# EAGLE board zigbee_ctrl (EAGLE 6.6.0)
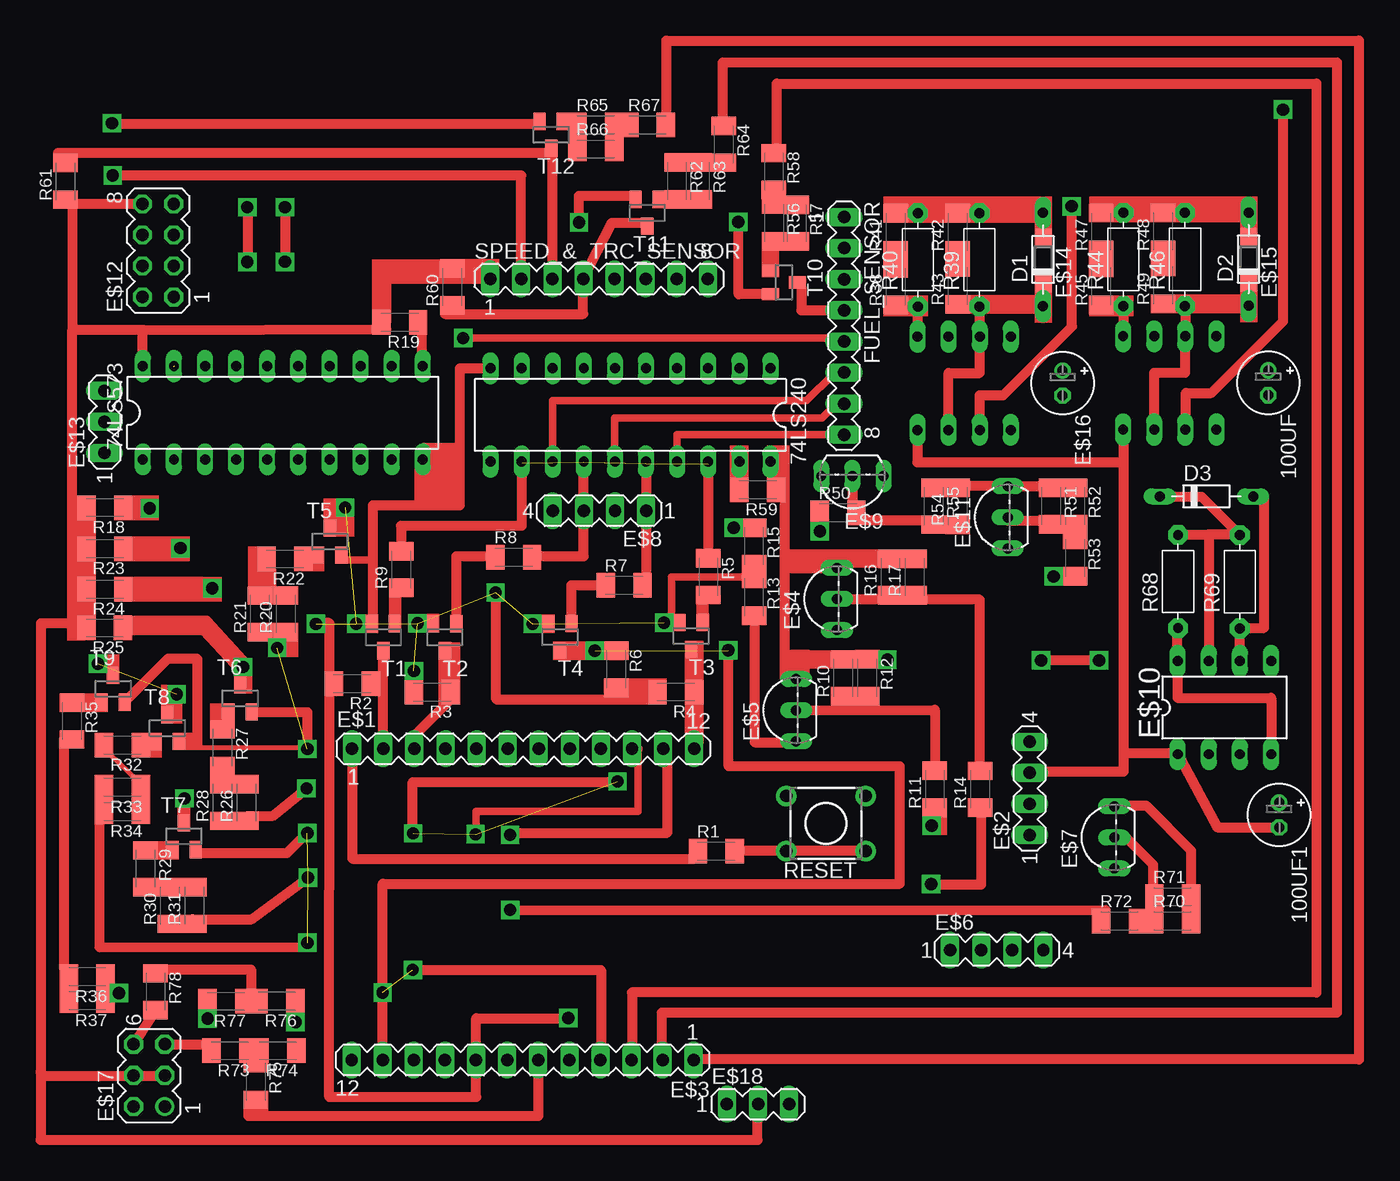
[diagram p0: board, top side]
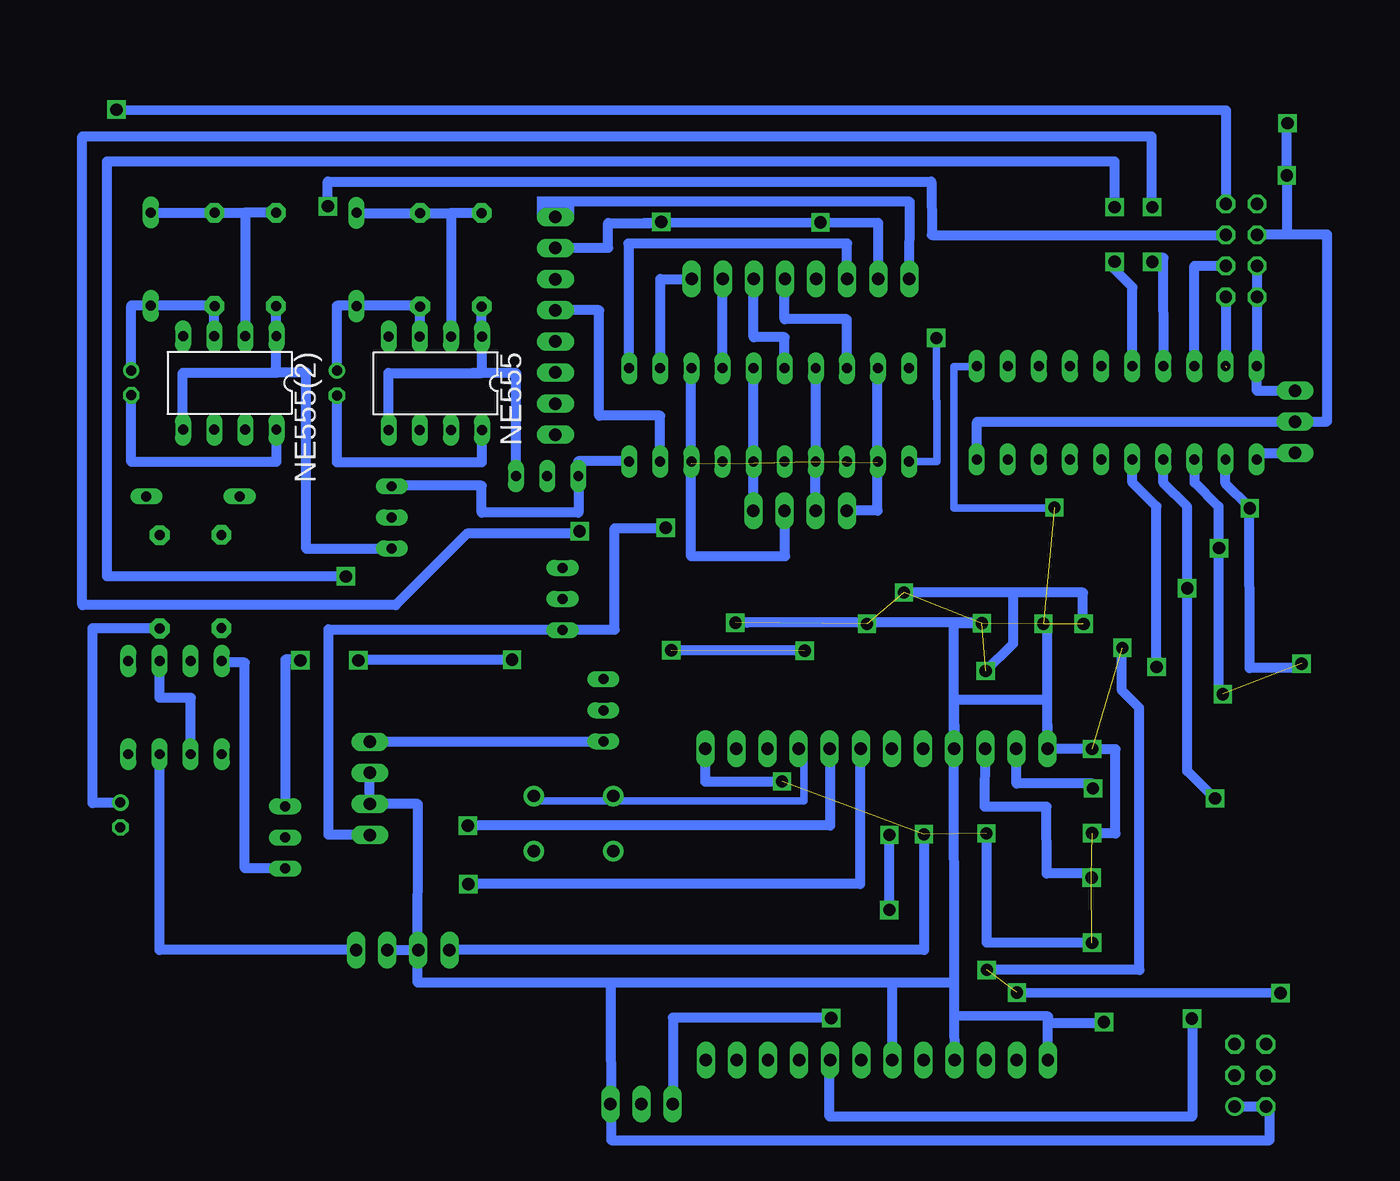
[diagram p1: board, bottom side, seen from below]

No outline drawn. Coordinates in mm, seen from the top.
Copper layers (1*16): Top 0.035mm / dielectric 1.5mm / Bottom 0.035mm
Design rules "default": minimum track width 10mil, minimum drill 24mil, track to track 8mil, track to pad 8mil, pad to pad 8mil, via to via 8mil, smd to smd 8mil, copper to edge 40mil, drill to drill 8mil, minimum pad ring 10mil, minimum via ring 8mil, stop-mask expansion 4mil, vias tented up to drill 0mil, thermal gap 10mil

## Footprints (pad centres in the part's own frame; a part is rotated, then mirrored left to right if it is on the bottom)
DIL20 = drill 0.813 long: 1 -11.43,-3.81; 2 -8.89,-3.81; 3 -6.35,-3.81; 4 -3.81,-3.81; 5 -1.27,-3.81; 6 1.27,-3.81; 7 3.81,-3.81; 8 6.35,-3.81; 9 8.89,-3.81; 10 11.43,-3.81; 11 11.43,3.81; 12 8.89,3.81; 13 6.35,3.81; 14 3.81,3.81; 15 1.27,3.81; 16 -1.27,3.81; 17 -3.81,3.81; 18 -6.35,3.81; 19 -8.89,3.81; 20 -11.43,3.81
E2-5 = drill 0.813 pad 1.27: + -1.016,0 | drill 0.813 pad 1.27 octagon: - 1.016,0
D-7.5 = drill 0.813 long: A 3.81,0; C -3.81,0
MA12-1 = drill 1.016 long: 1 -13.97,0; 2 -11.43,0; 3 -8.89,0; 4 -6.35,0; 5 -3.81,0; 6 -1.27,0; 7 1.27,0; 8 3.81,0; 9 6.35,0; 10 8.89,0; 11 11.43,0; 12 13.97,0
MA04-1 = drill 1.016 long: 1 -3.81,0; 2 -1.27,0; 3 1.27,0; 4 3.81,0
TO92-LINE = drill 0.813 long: 1 2.54,0; 2 0,0; 3 -2.54,0
DIL8 = drill 0.813 long: 1 -3.81,-3.81; 2 -1.27,-3.81; 3 1.27,-3.81; 4 3.81,-3.81; 5 3.81,3.81; 6 1.27,3.81; 7 -1.27,3.81; 8 -3.81,3.81
MA04-2 = drill 1.016 octagon: 1 -3.81,-1.27; 2 -3.81,1.27; 3 -1.27,-1.27; 4 -1.27,1.27; 5 1.27,-1.27; 6 1.27,1.27; 7 3.81,-1.27; 8 3.81,1.27
MA03-1 = drill 1.016 long: 1 -2.54,0; 2 0,0; 3 2.54,0
SOD123 = smd 1.4 x 1.4: A 1.9,0; C -1.9,0
MA03-2 = drill 1.016: 1 -2.54,-1.27 | drill 1.016 octagon: 2 -2.54,1.27; 3 0,-1.27; 4 0,1.27; 5 2.54,-1.27; 6 2.54,1.27
MA08-1 = drill 1.016 long: 1 -8.89,0; 2 -6.35,0; 3 -3.81,0; 4 -1.27,0; 5 1.27,0; 6 3.81,0; 7 6.35,0; 8 8.89,0
C1206K = smd 1.5 x 2: 1 -1.5,0; 2 1.5,0
R-7,5 = drill 0.813 pad 1.6 octagon: 1 -3.81,0; 2 3.81,0
TL1105 = drill 1 pad 1.676: 1 -2.25,3.25; 2 2.25,3.25; 3 -2.25,-3.25; 4 2.25,-3.25
SOT23 = smd 1 x 1.4: 1 -0.95,-1.1; 2 0.95,-1.1; 3 0,1.1

## Placement (x,y rotation side)
74LS240  [DIL20]  46.86,56.94 180 top
74LS573  [DIL20]  18.47,57.12 0 top
100UF  [E2-5]  98.94,59.56 270 top
100UF1  [E2-5]  99.83,24.26 270 top
D1  1N4148  [D-7.5]  80.55,69.63 90 top
D2  1N4148  [D-7.5]  97.34,69.66 90 top
D3  1N4148  [D-7.5]  93.9,50.29 0 top
E$1  [MA12-1]  38.1,29.67 0 top
E$2  [MA04-1]  79.46,26.44 90 top
E$3  [MA12-1]  38.06,4.26 180 top
E$4  [TO92-LINE]  63.73,41.91 90 top
E$5  [TO92-LINE]  60.39,32.82 90 top
E$6  [MA04-1]  76.77,13.23 0 top
E$7  [TO92-LINE]  86.38,22.43 90 top
E$8  [MA04-1]  44.33,49.12 180 top
E$9  [TO92-LINE]  64.98,51.95 180 top
E$10  [DIL8]  95.37,33.04 0 top
E$11  [TO92-LINE]  77.67,48.57 90 top
E$12  [MA04-2]  8.29,70.37 90 top
E$13  [MA03-1]  3.92,56.38 90 top
E$14  [SOD123]  80.58,69.56 270 top
E$15  [SOD123]  97.37,69.59 270 top
E$16  100uf  [E2-5]  82.15,59.53 270 top
E$17  [MA03-2]  7.56,3 90 top
E$18  [MA03-1]  57.28,0.65 0 top
FUEL_SENSOR  [MA08-1]  64.3,64.21 270 top
NE555  [DIL8]  74.11,59.52 180 bottom
NE555(2)  [DIL8]  90.9,59.55 180 bottom
R1  1k_Ohm  [C1206K]  53.88,21.3 0 top
R2  10k_Ohm  [C1206K]  24.15,34.99 180 top
R3  10k_Ohm  [C1206K]  30.68,34.3 180 top
R4  10k_Ohm  [C1206K]  50.57,34.31 180 top
R5  1k_Ohm  [C1206K]  53.23,43.73 270 top
R6  10k_Ohm  [C1206K]  45.7,36.17 270 top
R7  1k_Ohm  [C1206K]  46.35,43.02 0 top
R8  1k_Ohm  [C1206K]  37.33,45.32 0 top
R9  1k_Ohm  [C1206K]  28.14,44.31 90 top
R10  10k_Ohm  [C1206K]  64.23,35.47 90 top
R11  1k1_Ohm  [C1206K]  71.72,26.37 90 top
R12  10k_Ohm  [C1206K]  66.2,35.48 270 top
R13  10k_Ohm  [C1206K]  56.95,42.05 270 top
R14  1k1_Ohm  [C1206K]  75.41,26.36 90 top
R15  10k_Ohm  [C1206K]  56.95,46.23 270 top
R16  10k_Ohm  [C1206K]  68.09,43.7 90 top
R17  10k_Ohm  [C1206K]  70.07,43.7 90 top
R18  10k_Ohm  [C1206K]  3.94,49.37 180 top
R19  1k_Ohm  [C1206K]  28.02,64.5 180 top
R20  1k1_Ohm  [C1206K]  18.72,40.69 90 top
R21  1k1_Ohm  [C1206K]  16.61,40.69 90 top
R22  100_Ohm  [C1206K]  18.65,45.17 180 top
R23  10k_Ohm  [C1206K]  3.94,46.02 180 top
R24  10k_Ohm  [C1206K]  3.94,42.71 180 top
R25  10k_Ohm  [C1206K]  3.93,39.54 180 top
R26  1k1_Ohm  [C1206K]  15.51,25.28 90 top
R27  100_Ohm  [C1206K]  13.54,29.75 270 top
R28  1k1_Ohm  [C1206K]  13.54,25.28 90 top
R29  100_Ohm  [C1206K]  7.27,19.87 270 top
R30  1k1_Ohm  [C1206K]  9.26,16.87 90 top
R31  1k1_Ohm  [C1206K]  11.24,16.87 90 top
R32  100_Ohm  [C1206K]  5.38,29.97 180 top
R33  1k1_Ohm  [C1206K]  5.38,26.53 180 top
R34  1k1_Ohm  [C1206K]  5.38,24.55 180 top
R35  100_Ohm  [C1206K]  1.25,31.94 270 top
R36  1k1_Ohm  [C1206K]  2.5,11.06 180 top
R37  1k1_Ohm  [C1206K]  2.5,9.1 180 top
R38  10k_Ohm  [C1206K]  68.52,67.41 90 top
R39  4.7k  [R-7,5]  75.36,69.61 90 top
R40  4.7k  [R-7,5]  70.33,69.61 90 top
R41  10k_Ohm  [C1206K]  68.52,71.88 90 top
R42  10k_Ohm  [C1206K]  73.57,71.89 90 top
R43  10k_Ohm  [C1206K]  73.57,67.48 90 top
R44  4.7k  [R-7,5]  87.12,69.64 90 top
R45  10k_Ohm  [C1206K]  85.31,67.44 90 top
R46  4.7k  [R-7,5]  92.15,69.64 90 top
R47  10k_Ohm  [C1206K]  85.31,71.91 90 top
R48  10k_Ohm  [C1206K]  90.36,71.92 90 top
R49  10k_Ohm  [C1206K]  90.36,67.51 90 top
R50  10k_Ohm  [C1206K]  63.82,48.93 0 top
R51  10k_Ohm  [C1206K]  81.21,49.5 270 top
R52  10k_Ohm  [C1206K]  83.18,49.5 270 top
R53  10k_Ohm  [C1206K]  83.16,45.25 270 top
R54  10k_Ohm  [C1206K]  73.57,49.48 90 top
R55  10k_Ohm  [C1206K]  71.61,49.49 270 top
R56  1k1_Ohm  [C1206K]  58.59,72.61 270 top
R57  1k1_Ohm  [C1206K]  60.43,72.6 270 top
R58  100_Ohm  [C1206K]  58.58,76.81 270 top
R59  10k_Ohm  [C1206K]  57.25,50.82 180 top
R60  1k_Ohm  [C1206K]  32.31,67.39 90 top
R61  1k_Ohm  [C1206K]  0.73,76.02 90 top
R62  1k1_Ohm  [C1206K]  50.66,76.05 270 top
R63  1k1_Ohm  [C1206K]  52.54,76.05 270 top
R64  100_Ohm  [C1206K]  54.49,79.04 270 top
R65  1k1_Ohm  [C1206K]  44.04,80.62 0 top
R66  1k1_Ohm  [C1206K]  44.03,78.64 0 top
R67  100_Ohm  [C1206K]  48.25,80.62 0 top
R68  4.7k  [R-7,5]  91.58,43.33 90 top
R69  4.7k  [R-7,5]  96.62,43.31 90 top
R70  10k_Ohm  [C1206K]  91.14,15.6 0 top
R71  10k_Ohm  [C1206K]  91.14,17.58 0 top
R72  1k_Ohm  [C1206K]  86.81,15.6 0 top
R73  1k1_Ohm  [C1206K]  14.14,5.01 180 top
R74  1k1_Ohm  [C1206K]  18.08,5.01 180 top
R75  1k1_Ohm  [C1206K]  16.27,2.51 270 top
R76  1k1_Ohm  [C1206K]  17.99,9.07 180 top
R77  1k1_Ohm  [C1206K]  13.83,9.05 180 top
R78  1k1_Ohm  [C1206K]  8.09,9.83 270 top
RESET  [TL1105]  62.83,23.57 90 top
SPEED_&_TRC_SENSOR  [MA08-1]  44.29,68.04 0 top
T1  BCW33  [SOT23]  26.68,38.78 180 top
T2  BCW33  [SOT23]  31.7,38.78 180 top
T3  BCW33  [SOT23]  51.81,38.88 180 top
T4  BCW33  [SOT23]  41.1,38.8 180 top
T5  BCW33  [SOT23]  22.31,46.59 0 top
T6  BCW33  [SOT23]  14.98,33.79 0 top
T7  BCW33  [SOT23]  10.4,22.53 0 top
T8  BCW33  [SOT23]  9.04,31.36 0 top
T9  BCW33  [SOT23]  4.61,34.57 0 top
T10  BCW33  [SOT23]  59.39,67.76 270 top
T11  BCW33  [SOT23]  48.23,73.44 180 top
T12  BCW33  [SOT23]  40.39,79.81 180 top

## Library data of the parts
74LS240 = 74ttl-din
74LS573 = 40xx
100UF 100UF1 E$16 R1-R38 R41-R43 R45 R47-R67 R70-R78 = rcl
D1-D3 E$14 E$15 = diode
E$1-E$3 E$6 E$8 E$12 E$13 E$17 E$18 FUEL_SENSOR SPEED_&_TRC_SENSOR = con-lstb
E$4 E$5 E$7 E$9 E$11 = ref-packages-longpad
E$10 NE555 NE555(2) = microchip
R39 R40 R44 R46 R68 R69 = discrete
RESET = switch
T1-T12 = smd-ipc

## Nets
S$28: SPEED_&_TRC_SENSOR.8
S$31: SPEED_&_TRC_SENSOR.5
S$46: SPEED_&_TRC_SENSOR.3
S$48: E$5.2
S$71: E$8.3

## Tracks (layer width: path | path; a pad name or v marks a point on that pad's centre or on a via)
S$1
  Bottom 0.813: 31.71,4.19 31.76,7.86 24.09,7.81 24.09,4.34
S$2
  Bottom 0.813: 31.78,33.69 31.74,29.68 | 31.74,7.42 31.78,33.69 | 24.15,29.74 24.19,33.69 31.78,33.69
S$3
  Top 0.813: 66.05,21.37 55.09,21.37 55.09,21.31
S$4
  Top 0.813: 52.09,20.7 24.17,20.7 24.17,29.75
S$5
  Bottom 0.61: 66.09,25.43 43.99,25.43 43.99,29.71
S$6
  Top 0.813: 22.29,35 22.26,1.24 34.26,1.24 34.26,4.27 34.26,4.36 34.26,7.66 41.86,7.66
S$7
  Top 0.813: 26.66,29.64 26.66,37.11
S$8  (via drill 1)  (7 unrouted)
  other vias: 24.46,39.88 29.48,39.92 21.18,39.87 29.17,36.03 49.61,39.97 38.87,39.87 35.85,42.43 23.56,49.37
S$9
  Bottom 0.813: 24.13,29.7 24.13,39.91
S$10
  Bottom 0.813: 31.77,29.63 31.77,39.93 29.43,39.93
S$11
  Top 0.813: 22.28,34.36 22.28,39.93 21.17,39.93
S$12
  Bottom 0.813: 21.22,39.86 21.22,42.43 26.93,42.43 26.93,38.26
S$13
  Top 0.813: 29.2,29.64 29.2,30.73 32.23,33.76
S$14
  Bottom 0.813: 26.92,39.47 26.92,38.27 29.24,35.99
S$15
  Bottom 0.813: 29.45,39.97 48.63,39.97 49.63,39.98
S$16
  Top 0.813: 53.27,52.13 53.23,52.13 53.23,45.37
S$17  (3 unrouted)
  Bottom 0.813: 53.23,52.93 53.23,60.73 | 48.13,52.97 48.13,60.77 | 43.04,53.07 43.04,60.87 | 37.99,53.02 37.99,60.82
S$18  (via drill 1)  (1 unrouted)
  other vias: 54.85,37.72 43.95,37.67 62.33,47.44 81.42,43.75
S$19
  Top 0.813: 26.64,4.26 26.64,18.64 68.85,18.64 68.85,28.25
S$20
  Bottom 0.813: 54.8,37.68 43.94,37.68 43.94,37.71
S$21
  Bottom 0.813: 24.96,42.44 35.9,42.44
S$22
  Top 0.813: 35.9,42.48 35.9,33.71 48.85,33.71
S$23
  Top 0.813: 48.19,42.76 48.19,53.12
S$24
  Top 0.813: 42.05,39.99 42.05,43.03 45.09,43.03
S$25
  Top 0.813: 32.66,39.92 32.66,45.4 35.73,45.4
S$26
  Top 0.813: 38.81,45.4 43.05,45.4 43.05,53.12
S$27
  Top 0.813: 28.13,45.92 28.13,47.89 37.99,47.89 37.99,53.22
S$28
  Bottom 0.813: 55.73,60.7 55.73,68.04 SPEED_&_TRC_SENSOR.8
S$29
  Bottom 0.813: 50.67,60.73 50.67,68.04
S$30
  Bottom 0.813: 45.6,60.73 45.6,63.29 48.12,63.29 48.12,68.08
S$31
  Bottom 0.813: 40.5,60.81 40.5,64.76 45.6,64.76 45.6,68.04 SPEED_&_TRC_SENSOR.5
S$32
  Top 0.61: 50.68,53.14 50.68,55.32 64.36,55.32
S$33
  Top 0.61: 45.57,53.04 45.57,56.66 62.5,56.66 63.71,57.87
S$34
  Top 0.61: 40.52,53.09 40.52,58.1 61.25,58.1 63.34,60.19
S$35
  Top 0.813: 25.86,39.95 25.84,49.57 32.93,49.57
S$36  (via drill 1)
  Bottom 0.61: 35.45,53.14 33.17,53.14 v33.2,63.22 33.17,63.07
  other vias: 100.15,81.87 82.89,73.98 15.57,73.9 18.64,73.9 15.57,69.44 18.64,69.45 4.58,76.49 55.66,72.71 42.66,72.65 4.53,80.76
S$37
  Top 0.61: 33.24,63.21 63.47,63.21 63.23,62.83
S$38
  Top 0.813: 68.84,28.27 54.88,28.27 54.88,37.65
S$39
  Bottom 0.813: 41.86,29.66 41.86,23.4 70.72,23.4
S$40
  Bottom 0.813: 39.4,29.71 39.4,18.62 70.67,18.62
S$41  (via drill 1)
  other vias: 71.46,23.4 67.85,36.94 80.39,36.89 85.13,36.89
S$42  (via drill 1)
  other vias: 71.41,18.62
S$43
  Bottom 0.813: 35.4,68.03 35.37,74.35 64.29,74.35
S$44
  Bottom 0.813: 37.94,68 37.94,72.63 57.01,72.6
S$45
  Bottom 0.813: 55.75,53.12 55.75,56.87 60.74,56.87 60.74,65.49 64.37,65.49
S$46
  Bottom 0.813: SPEED_&_TRC_SENSOR.3 40.48,70.94 58.34,70.94 58.34,60.62
S$47
  Bottom 0.813: 56.48,72.6 59.99,72.6 60,70.56 64.33,70.56
S$48
  Top 0.813: E$5.2 71.71,32.86 71.71,27.71
S$49
  Top 0.813: 58.29,53.12 59.46,53.14 59.46,44.45 | 59.46,36.08 59.46,44.45 | 59.46,44.45 63.79,44.45
S$50
  Top 0.61: 57,43.68 50.2,43.68 50.2,39.91
S$51
  Top 0.813: 60.43,30.21 57.01,30.21 57.01,40.29
S$52
  Bottom 0.813: 60.38,30.24 79.48,30.24
S$53
  Top 0.813: 71.41,18.58 75.51,18.58 75.51,24.68
S$54  (via drill 1)
  other vias: 55.29,47.73
S$55
  Bottom 0.813: 55.27,47.7 59.46,47.7 59.46,39.38 63.8,39.38
S$56
  Top 0.813: 75.39,27.79 75.39,41.86 63.57,41.86
S$57
  Bottom 0.813: 63.82,39.43 82.84,39.43 82.84,22.65 79.44,22.65
S$58
  Bottom 0.813: 79.44,27.7 79.48,27.7 79.48,25.16 75.52,25.16 75.56,10.57 31.83,10.57
S$59  (via drill 1)  (2 unrouted)
  other vias: 34.21,22.69 29.11,22.76 45.81,27.01
S$60  (via drill 1)
  other vias: 37.03,22.64
S$61
  Bottom 0.813: 34.19,16.41 34.19,13.24 73.09,13.24
S$62  (via drill 1)
  other vias: 37.04,16.51
S$63
  Bottom 0.813: 34.25,22.99 34.19,22.99 34.19,16.46
S$64
  Bottom 0.813: 37.02,16.46 37.02,22.96
S$65
  Top 0.61: 34.25,22.96 34.25,24.57 47.46,24.55 47.46,29.67
  Top 0.813: 47.46,29.67 47.07,29.69
S$66
  Top 0.813: 37.02,22.81 49.87,22.81 49.87,29.69
S$67
  Top 0.813: 37.07,16.52 85.66,16.48
S$68
  Bottom 0.813: 78.04,13.21 75.54,13.21 75.54,13.23
S$69
  Bottom 0.813: 45.56,49.08 45.56,45.39 53.22,45.39 53.22,53.13
S$70
  Bottom 0.813: 48.12,49.08 48.12,53.1
S$71
  Bottom 0.813: E$8.3 43.06,53.13
S$72
  Bottom 0.813: 40.54,49.12 38,49.12 38,53.19
S$73
  Bottom 0.813: 45.8,26.97 52.07,26.97 52.07,29.7
S$74
  Top 0.813: 29.08,22.72 29.08,26.96 45.8,26.96
S$75
  Top 0.813: 32.93,49.57 32.93,60.75 35.53,60.75
S$76
  Bottom 0.813: 3.92,56.37 29.88,56.37 29.88,53.18
S$77
  Bottom 0.813: 3.92,53.81 7.06,53.81 7.06,53.22
S$78
  Bottom 0.813: 3.92,58.89 7.02,58.89 7.02,60.99
S$79
  Top 0.813: 7.03,60.84 7.03,63.87 26.91,63.93
S$80
  Top 0.813: 29.85,60.74 29.85,63.77
S$81
  Bottom 0.61: 23.57,49.34 31.76,49.34 31.76,60.9 29.83,60.9
S$82
  Top 0.61: 23.32,45.14 23.32,45.1 25.78,45.1
S$83  (via drill 1)  (1 unrouted)
  Top 0.813: 44.45,4.25 44.45,11.61 v29.08,11.61
  other vias: 26.62,9.77
S$84
  Bottom 0.813: 29.23,11.6 16.62,11.6 16.63,33.01
S$85  (via drill 1)  (1 unrouted)
  other vias: 18.01,37.91 20.47,29.66
S$86
  Bottom 0.813: 9.59,53.3 9.59,51.35 7.65,49.41 7.64,49.41 7.62,36.39
S$87
  Bottom 0.813: 12.1,53.35 12.1,51.4 10.16,49.46 10.15,49.46 10.15,34.01
S$88  (via drill 1)
  Bottom 0.813: 14.66,53.34 14.66,51.39 12.72,49.45 12.71,49.45 v12.71,42.79 12.71,34.02 12.71,34 12.71,27.86 10.43,25.58
S$89
  Bottom 0.813: 17.18,53.35 17.18,51.4 15.24,49.46 15.23,49.46 15.23,36.27
S$90  (via drill 1)
  other vias: 7.6,49.32
S$91  (via drill 1)
  other vias: 10.12,46.06
S$92  (via drill 1)
  other vias: 15.22,36.35
S$93
  Top 0.813: 5.75,40.13 12.26,40.13 15.57,36.52
S$94
  Top 0.813: 5.73,39.37 12,39.37 15.01,36.12
S$95
  Top 0.813: 7.1,63.89 1.28,63.89 1.28,49.72
S$96
  Bottom 0.813: 20.46,29.67 24.19,29.67 24.19,29.7
S$97
  Top 0.813: 15.94,32.66 20.47,32.66 20.47,29.59
S$98  (via drill 1)
  Top 0.813: 15.59,24.16 17.6,24.16 v20.41,26.44
S$99
  Bottom 0.813: 20.45,26.83 26.66,26.83 26.66,29.7
S$100  (via drill 1)  (2 unrouted)
  other vias: 20.47,22.78 20.53,19.15 20.48,13.83 19.51,7.35 41.78,7.68 41.78,7.68
S$101
  Top 0.813: 11.39,21.15 18.81,21.15 20.47,22.81
S$102
  Bottom 0.813: 16.65,33.03 18.05,34.43 18.04,37.9
S$103
  Bottom 0.813: 20.47,29.63 18.58,29.63 18.58,22.75 20.5,22.75 20.5,22.78
S$104  (via drill 1)
  other vias: 10.43,25.62
S$105
  Top 0.813: 11.08,15.76 15.94,15.76 20.57,19.15
S$106  (via drill 1)  (1 unrouted)
  other vias: 9.81,34.13 3.37,36.62
S$107
  Top 0.406: 10.45,29.78 20.28,29.78
S$108
  Top 0.406: 6.59,27.09 4.41,29.13
S$109
  Top 0.813: 3.51,25.01 3.51,13.47 20.8,13.49
S$110
  Bottom 0.813: 3.31,36.27 7.62,36.27 7.62,36.72
S$111
  Top 0.813: 5.59,33.52 9.08,37.01 11.46,37.01 11.5,36.97 11.5,30.05
S$112
  Top 0.813: 1.1,11.67 0.64,11.67 0.64,30.54
S$113
  Bottom 0.813: 20.42,19.49 24.19,19.49 24.2,24.93 29.24,24.93 29.21,29.74
S$114
  Bottom 0.813: 20.5,13.83 29.09,13.83 29.09,22.82
S$115  (via drill 1)
  Bottom 0.813: 26.66,9.76 v5.09,9.72 4.89,9.72
  other vias: 12.33,7.64
S$116  (1 unrouted)
  Bottom 0.813: 9.53,60.84 9.53,66.64
S$117
  Bottom 0.813: 6.99,60.92 6.99,69.19
S$118
  Bottom 0.813: 3.93,56.41 1.29,56.41 1.29,71.66 7.05,71.66
S$119
  Bottom 0.813: 12.13,60.92 12.13,69.12 9.45,69.12
S$120
  Top 0.813: 6.95,74.16 1.29,74.16 1.29,63.84
S$121
  Bottom 0.813: 70.32,63.32 70.32,65.79 | 75.37,63.32 75.37,65.79
S$122
  Bottom 0.813: 70.32,73.43 72.84,73.43 | 72.84,73.43 72.84,63.29 | 75.46,73.43 72.84,73.43
S$123
  Bottom 0.813: 80.58,73.43 75.33,73.43
S$124
  Bottom 0.813: 82.15,60.55 82.15,65.85 75.4,65.85
S$125
  Top 0.813: 70.31,65.84 70.31,63.32
S$126
  Top 0.813: 75.26,65.84 75.37,65.84 75.37,63.3
S$127
  Bottom 0.813: 77.94,55.68 77.94,60.36 70.31,60.36 70.31,63.24
S$128
  Top 0.813: 72.84,55.66 72.84,60.36 75.38,60.36 75.38,63.3
S$129
  Bottom 0.813: 70.32,55.71 70.32,53.06 82.15,53.06 82.15,58.51
S$130
  Bottom 0.813: 87.11,63.35 87.11,65.82 | 92.16,63.35 92.16,65.82
S$131
  Bottom 0.813: 87.11,73.46 89.63,73.46 | 89.63,73.46 89.63,63.32 | 92.25,73.46 89.63,73.46
S$132
  Bottom 0.813: 97.37,73.46 92.12,73.46
S$133
  Bottom 0.813: 98.94,60.58 98.94,65.88 92.19,65.88
S$134
  Top 0.813: 87.1,65.87 87.1,63.35
S$135
  Top 0.813: 92.05,65.87 92.16,65.87 92.16,63.33
S$136
  Bottom 0.813: 94.73,55.71 94.73,60.39 87.1,60.39 87.1,63.27
S$137
  Top 0.813: 89.63,55.69 89.63,60.39 92.17,60.39 92.17,63.33
S$138
  Bottom 0.813: 87.11,55.74 87.11,53.09 98.94,53.09 98.94,58.54
S$139
  Bottom 0.813: 58.28,53.16 62.43,53.16 62.43,48.96 70.32,48.96 70.32,51.15 77.71,51.15
S$140
  Bottom 0.813: 67.51,51.98 67.51,60.34 71.15,60.34
S$141
  Top 0.813: 70.28,55.7 70.28,53.07 87.15,53.07 | 87.15,53.07 87.15,55.79 | 79.49,27.81 87.15,27.81 87.15,29.35 | 87.15,29.35 87.15,53.07 | 87.15,29.35 91.54,29.35 94.77,23.26 99.89,23.27
S$142
  Top 0.813: 77.7,51.11 77.7,51.14 73.45,51.14
S$143
  Top 0.813: 64.97,51.96 64.97,48.34 73.75,48.34
S$144
  Top 0.813: 77.7,51.14 82.46,51.14
S$145
  Top 0.813: 77.55,48.32 80.52,48.32 80.64,47.93
S$146
  Bottom 0.813: 77.7,45.99 84.65,45.99 84.65,60.4 87.46,60.4
S$147
  Top 0.813: 92.21,55.73 92.21,58.66
S$148
  Top 0.813: 92.22,58.73 94.31,58.73 100.17,64.59 100.17,81.78
S$149
  Bottom 0.813: 9.53,74.21 9.53,81.8 100.17,81.81
S$150
  Top 0.813: 75.38,55.7 75.38,58.55 77.31,58.55 82.91,64.15 82.91,74
S$151
  Bottom 0.813: 82.9,73.99 82.9,75.99 33.62,75.99 33.57,71.62 9.46,71.62
S$152
  Bottom 0.813: 81.42,43.76 100.91,43.76 100.91,77.64 18.65,77.64 18.65,73.92
S$153
  Bottom 0.813: 62.35,47.24 71.52,47.24 77.35,41.41 102.93,41.41 102.93,79.69 15.63,79.69 15.63,73.92 15.52,73.92
S$154
  Top 0.813: 15.62,73.91 15.62,69.37 | 18.65,73.96 18.65,69.42
S$155
  Bottom 0.813: 14.64,60.87 14.65,69.78 15.63,69.78
S$156
  Bottom 0.813: 17.18,60.87 17.18,67.37 18.87,69.06
S$157
  Top 0.813: 60.82,67.38 60.82,65.49 64.42,65.49
S$158
  Top 0.813: 58.81,78.51 58.81,83.99 102.88,83.99 102.88,9.78 46.97,9.78 46.97,4.17
S$159
  Top 0.813: 35.44,68.01 26.91,68.01 26.91,64.58
S$160
  Top 0.813: 37.94,67.97 37.94,76.49 4.54,76.49
S$161
  Bottom 0.813: 4.59,76.54 4.59,71.68 7.07,71.66
S$162
  Top 0.813: 32.31,65.55 31.72,65.18 42.99,65.18 42.99,68.12
S$163
  Top 0.813: 40.48,68.07 40.48,78.33 0.13,78.33
S$164
  Top 0.813: 58.42,66.8 55.7,66.8 55.7,72.75
S$165
  Top 0.813: 42.98,68.05 45.35,72.63 48.27,72.64
S$166
  Top 0.813: 42.66,72.7 42.66,74.83 47.22,74.83
S$167
  Top 0.813: 54.4,80.75 54.4,85.73 104.55,85.73 104.55,8.12 49.41,8.12 49.41,4.21
S$168
  Bottom 0.813: 4.56,76.47 4.6,76.47 4.6,80.67
S$169
  Top 0.813: 4.47,80.72 39.48,80.72 39.48,80.75
S$170
  Top 0.813: 49.8,80.66 49.8,87.51 106.35,87.51 106.35,4.3 51.91,4.3
S$171
  Top 0.813: 91.57,36.87 91.54,36.87 91.54,39.61 | 96.64,36.85 96.64,39.59
S$172
  Top 0.813: 91.58,47.19 94.06,47.19 94.11,47.19 | 94.11,47.19 94.11,36.81 | 96.58,46.98 96.58,47.19 94.11,47.19
S$173
  Top 0.813: 90.08,50.26 93.49,50.26 96.63,47.12
S$174
  Top 0.813: 96.65,39.55 98.61,39.55 98.61,50.26
S$175
  Bottom 0.813: 94.09,29.24 94.09,33.83 96.64,33.83 96.64,37.02
S$176
  Top 0.813: 91.52,36.88 91.52,33.83 99.18,33.83 99.18,29.21
S$177
  Bottom 0.813: 80.59,13.25 96.63,13.25 96.63,29.33
S$178
  Bottom 0.813: 99.84,25.25 102.11,25.25 102.11,39.53 96.63,39.53
S$179
  Top 0.813: 80.39,36.91 85.12,36.91
S$180
  Bottom 0.813: 85.13,36.96 86.36,36.96 86.36,24.95
S$181
  Bottom 0.813: 86.36,19.91 89.67,19.91 89.67,36.71 91.5,36.71 91.5,36.86
S$182
  Bottom 0.813: 67.79,36.91 80.44,36.91 80.44,36.96
S$183
  Top 0.813: 86.38,25.03 88.97,25.03 92.63,21.37 92.63,17.7
S$184
  Top 0.813: 89.55,17.87 89.55,20.21 87.32,22.44
S$185
  Top 0.813: 39.33,4.3 39.33,-0.33 15.68,-0.33 15.68,0.77
S$186
  Bottom 0.813: 19.46,7.26 24.08,7.26 24.08,7.82
S$187
  Top 0.813: 8.83,5.55 12.45,5.55 12.45,5.6
S$188
  Top 0.813: 6.28,5.52 8.19,8.45
S$189
  Top 0.813: 8.5,11.64 15.88,11.64 15.88,9.31
S$190
  Bottom 0.813: 12.3,7.75 12.3,-0.38 41.91,-0.38 41.91,4.29
S$191
  Bottom 0.813: 36.25,10.56 59.8,10.56 59.76,-2.29 5.97,-2.29 5.97,0.43 8.89,0.43
S$192
  Top 0.813: 2.21,39.92 -1.28,39.92 -1.28,2.98 8.81,2.98
S$193
  Top 0.813: -1.31,3.27 -1.31,-2.27 57.24,-2.27 57.24,0.59
S$194
  Bottom 0.813: 36.8,4.26 36.8,10.52
S$195
  Bottom 0.813: 41.81,7.71 54.72,7.71 54.72,0.63
(copper drawn outside any net)
  shapes: Bottom area x1, Top area x62